# Altium PCB ESP-RC-Car_OLDPCB.PcbDoc (part 1 of 2)
Units mm, origin at the board's own origin, x right, y up, seen from the top; angles counter-clockwise.
Board outline 100.25 x 60.25 mm, 4 copper layers (Top Layer, Int1 (Signal), Int2 (GND), Bottom Layer(PWR)), stack 1.586 mm thick; 110 components, 97 nets, 403 pads, 371 vias.
Unrouted connection lines stored in the file: 1.
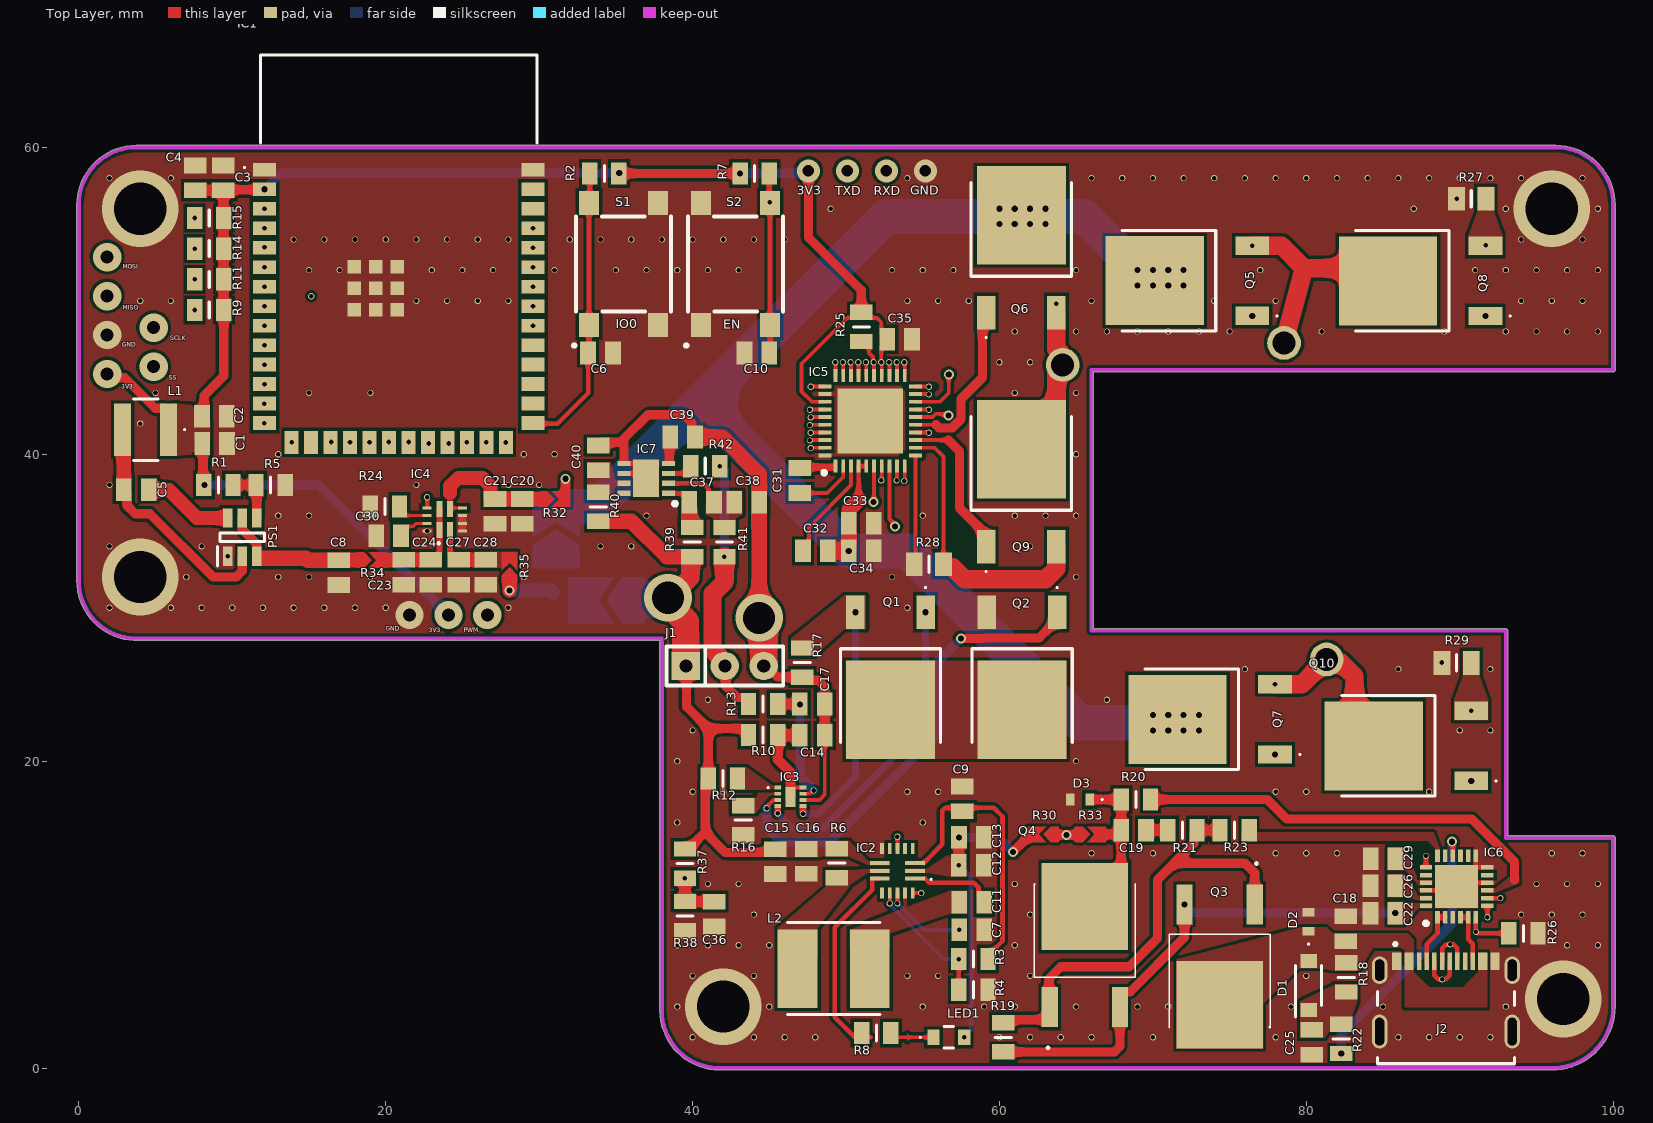
[diagram p0: Top Layer view]
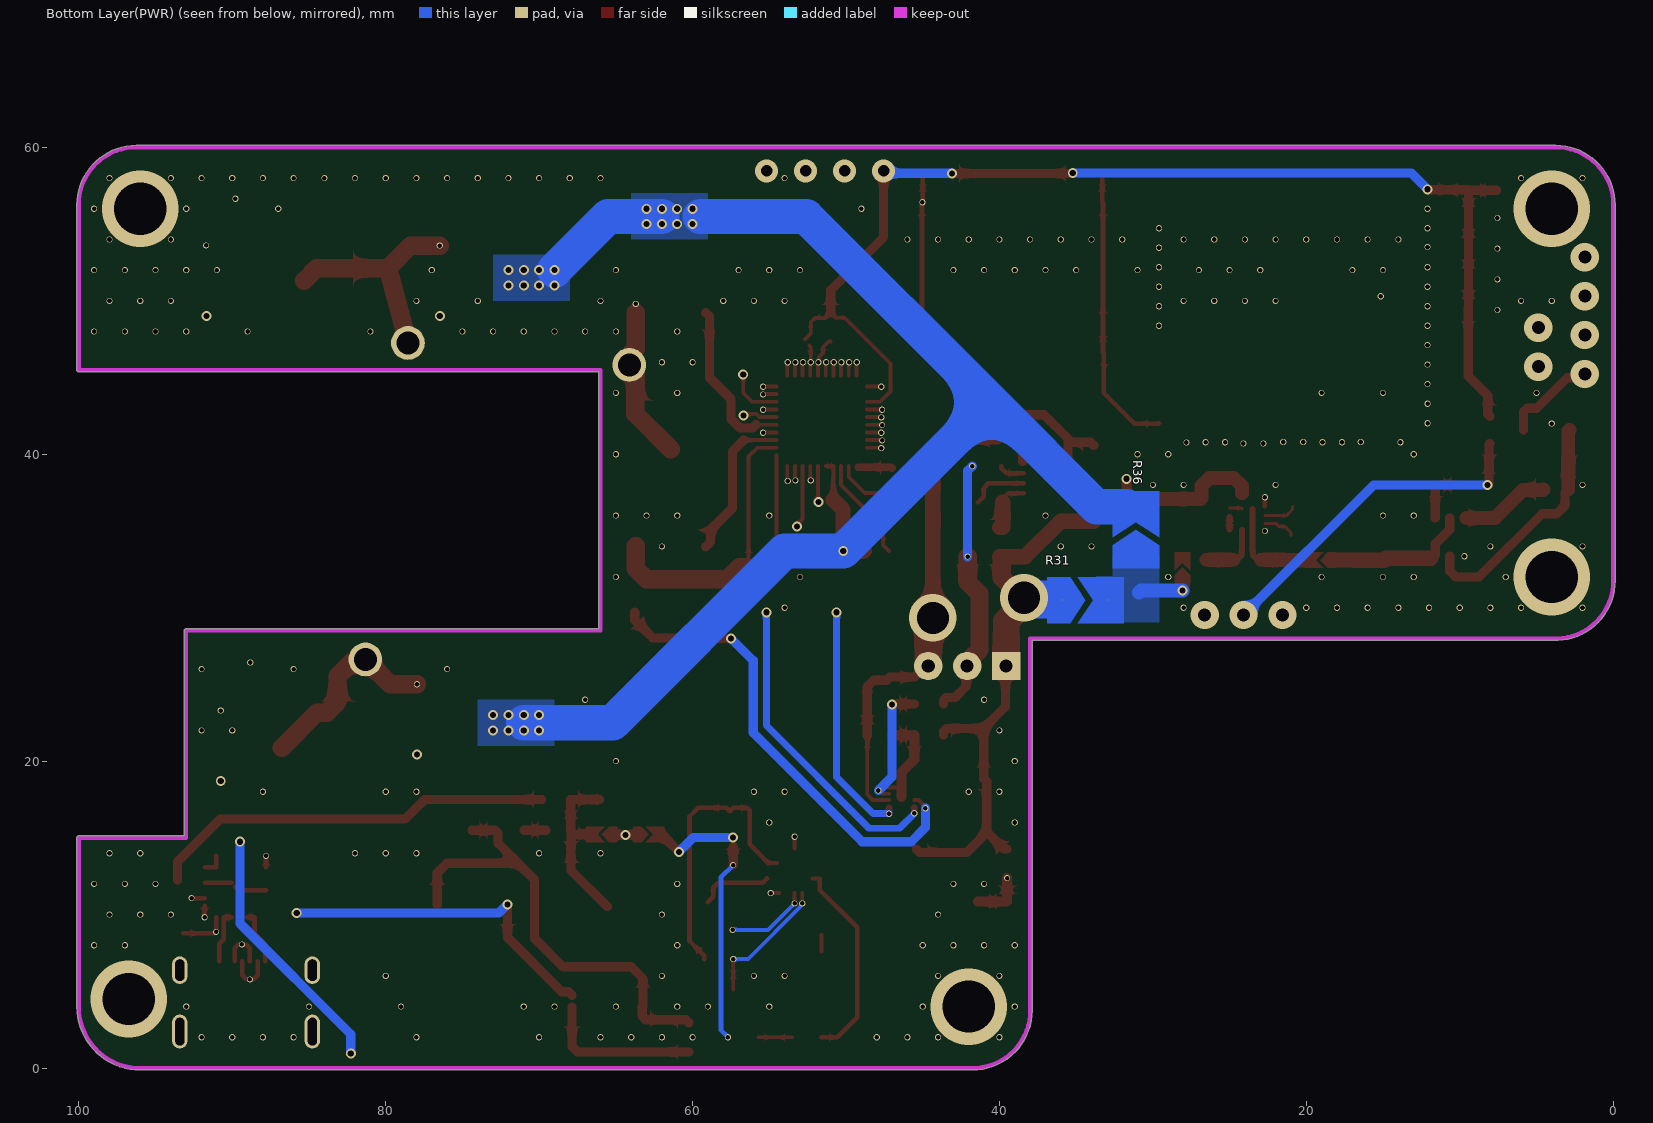
[diagram p1: Bottom Layer(PWR) view, seen from below]
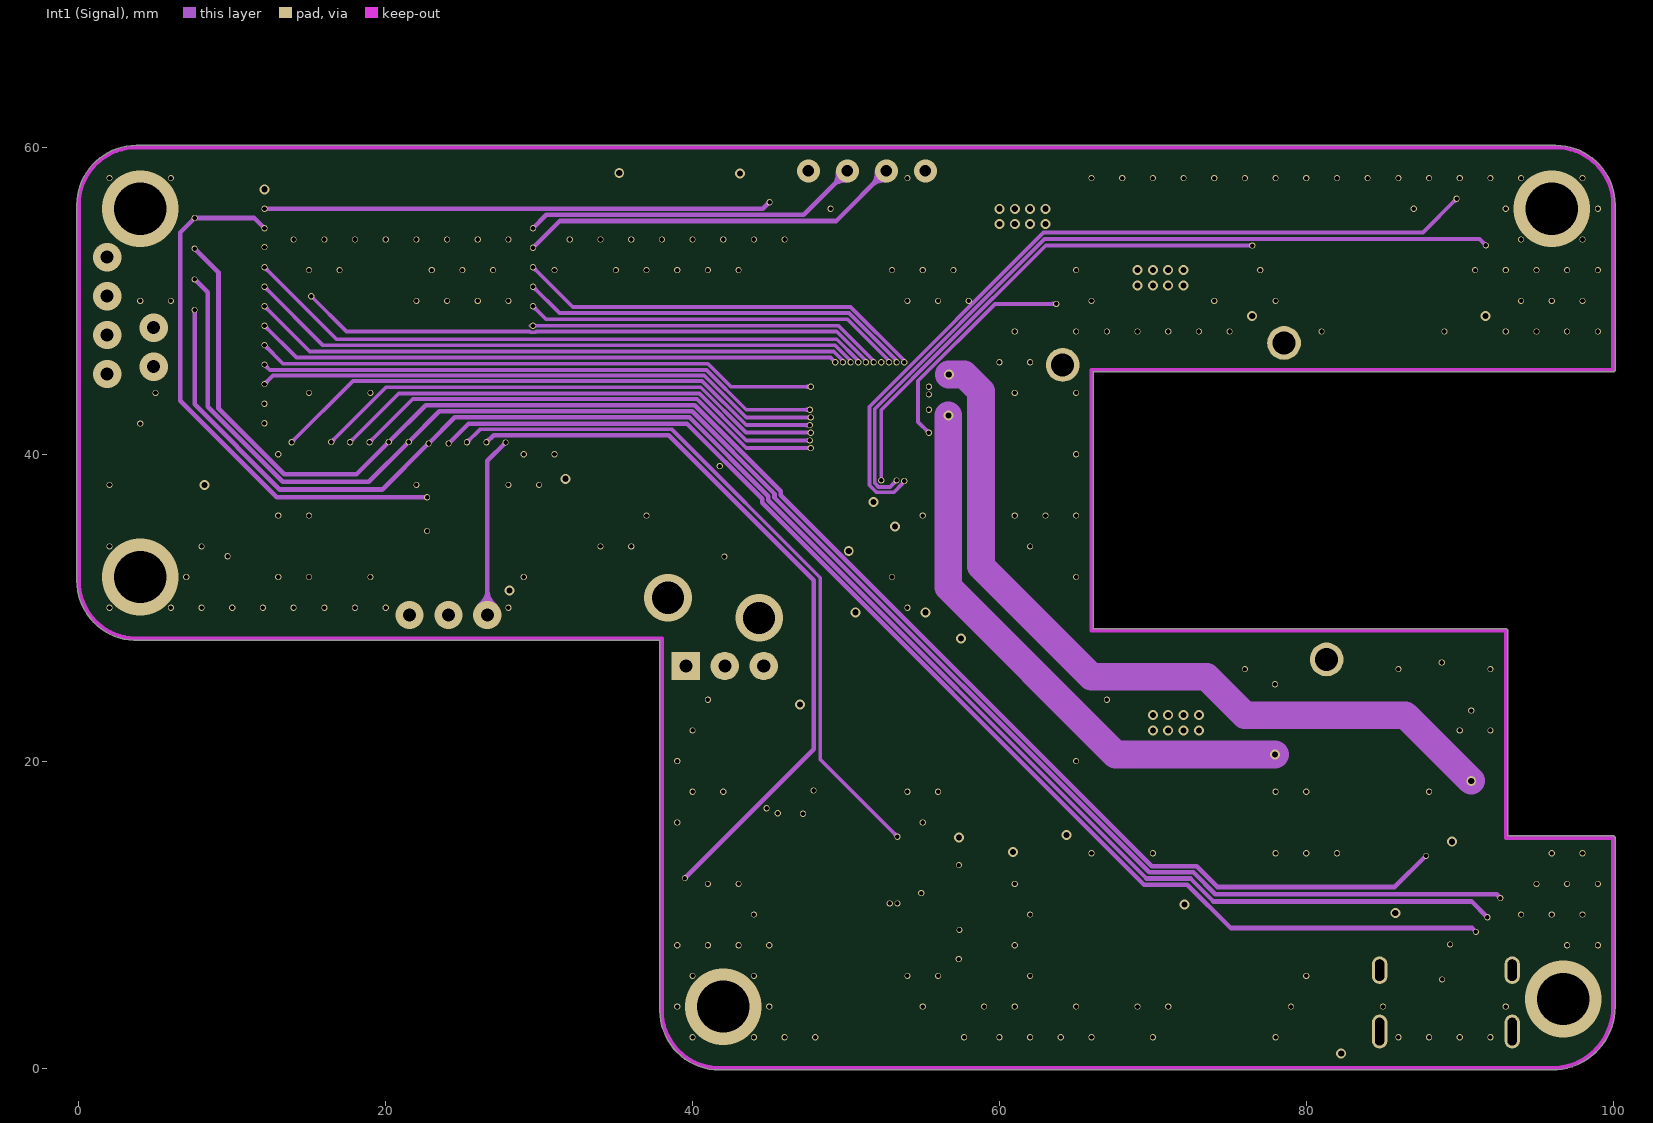
[diagram p2: Int1 (Signal)]
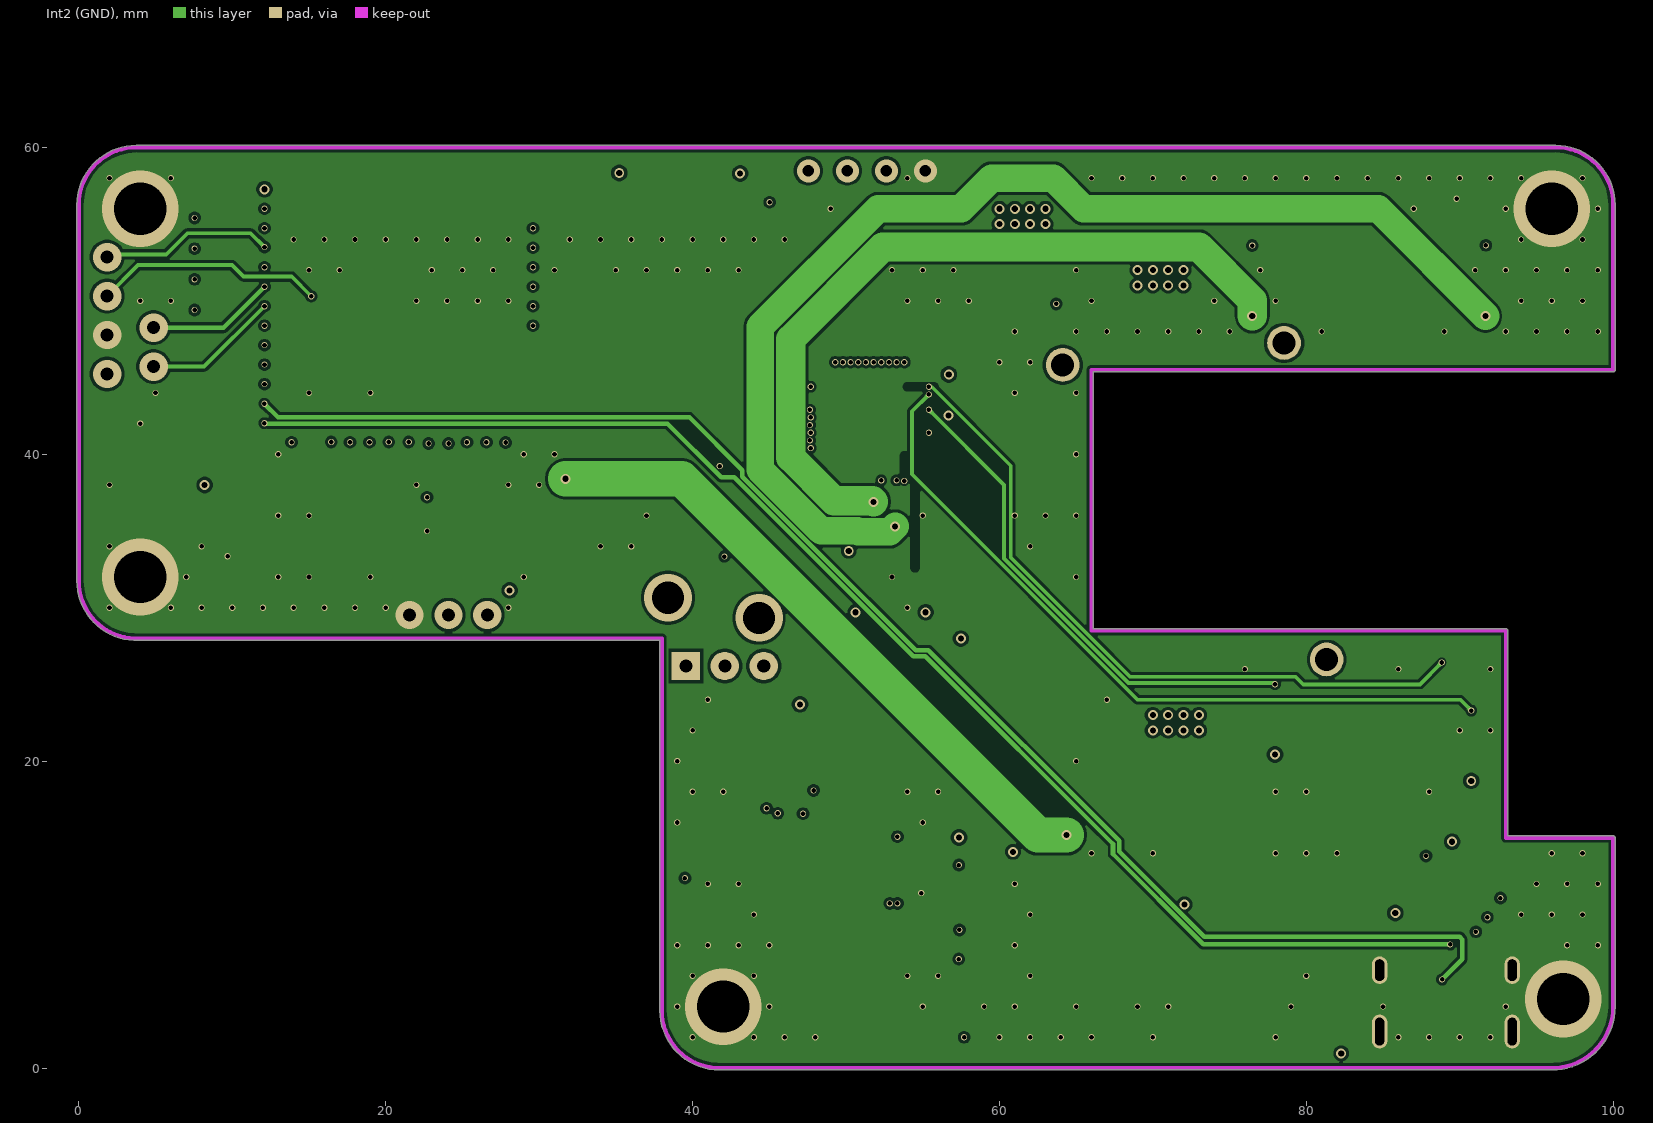
[diagram p3: Int2 (GND)]

## Layer stack, top to bottom
Top Solder: solder mask 0.0254, SM-001, Dk 4
Top Layer: signal copper 0.035
Dielectric 1: prepreg 0.2104, PP-017, Dk 4.3
Int1 (Signal): signal copper 0.0152
Dielectric 3: core 1.065, Core-039, Dk 4.8
Int2 (GND): signal copper 0.0152
Dielectric 5: prepreg 0.2104, PP-017, Dk 4.3
Bottom Layer(PWR): signal copper 0.035
Bottom Solder: solder mask 0.0254, SM-001, Dk 4

## Board outline
3.596,27.876 37.873,27.873 37.873,3.75 ccw(c41.75,3.75) 41.749,-0.127 41.75,-0.127 96,-0.127 ccw(c96,4) 100.127,4 100.127,5 100.127,15 ccw(c100,15) 100,15.127 93.127,15.127 93.127,28.5 ccw(c93,28.5) 93,28.627 66.127,28.627 66.127,45.373 100,45.373 ccw(c100,45.5) 100.127,45.5 100.127,56.25 ccw(c96.25,56.25) 96.25,60.127 3.75,60.127 ccw(c3.75,56.25) -0.127,56.25 -0.127,31.75 ccw(c3.75,31.75)

## Design rules (kind name [scope] priority, off if disabled: settings)
Clearance [All] p1: gap=0.2 ignorepadtopadclearanceinfootprint=TRUE except(0.1: Arc-Arc Arc-Track Arc-SMDPad Arc-THPad Arc-Via Arc-Text Arc-Hole Track-Track Track-SMDPad Track-THPad Track-Via Track-Text Track-Hole SMDPad-SMDPad SMDPad-THPad SMDPad-Via SMDPad-Text SMDPad-Hole THPad-THPad THPad-Via THPad-Text THPad-Hole Via-Via Via-Text Via-Hole Text-Text Text-Hole)
HoleSize [All] p1: absolutevalues=TRUE maxlimit=10 minlimit=0.025 maxpercent=80.000 minpercent=20.000
HoleToHoleClearance [All] p1: gap=0 allowstackedmicrovias=TRUE
PlaneConnect [All] p1: planeconnectstyle=Direct reliefexpansion=0.508 reliefentries=4 reliefconductorwidth=0.254 reliefairgap=0.254
PolygonConnect [All] p1: connectstyle=Direct reliefconductorwidth=0.254 reliefentries=4 polygonreliefangle="90 Angle" airgapwidth=0.254
RoutingVias [All] p1: holewidth=10 width=10 viastyle="Through Hole" minholewidth=0.3 minwidth=0.4 maxholewidth=10 maxwidth=10
SolderMaskExpansion [All] p1: expansion=0.102 istentingtop=FALSE
SupplyNets "Schematic Supply Nets_10" [InNet('VBATM')] p1: voltage=0.000
SupplyNets "Schematic Supply Nets_9" [InNet('VBAT-')] p2: voltage=0.000
SupplyNets "Schematic Supply Nets_8" [InNet('VBAT+')] p3: voltage=0.000
SupplyNets "Schematic Supply Nets_2" [InNet('VDRAIN')] p4: voltage=0.000
SupplyNets "Schematic Supply Nets_3" [InNet('VBATJ')] p5: voltage=0.000
SupplyNets "Schematic Supply Nets_7" [InNet('GND')] p6: voltage=0.000
SupplyNets "Schematic Supply Nets_6" [InNet('VMCU')] p7: voltage=0.000
SupplyNets "Schematic Supply Nets_5" [InNet('VBUS')] p8: voltage=0.000
SupplyNets "Schematic Supply Nets_4" [InNet('VSYS')] p9: voltage=0.000
SupplyNets "Schematic Supply Nets" [InNet('3V3')] p10: voltage=0.000
Width [All] p1: maxlimit=10 minlimit=0.1 preferedwidth=0.254
27 further rules are at their usual default settings.

## Components (designator, comment, footprint, x,y, rotation, side; value= is the part's Value field where it differs from the comment)
C1 "0805 22uF" CAPC2012X94N 8.85,40.7 r0 top
C2 "0805 22uF" CAPC2012X94N 8.835,42.475 r0 top
C3 "0805 10uF" CAPC2012X94N 9.4,58.01 r270 top
C4 "0805 100nF" CAPC2012X94N 7.6,58.01 r270 top
C5 "0805 0.1uF" CAPC2012X94N 3.74,37.7 r180 top
C6 "0805 10nF" CAPC2012X94N 34,46.6 r180 top
C7 "0805 1uF" CAPC2012X94N 58.2,9 r180 top
C8 "0805 2.2uF" CAPC2012X94N 16.95,32.285 r90 top
C9 "0805 1uF" CAPC2012X94N 57.575,17.535 r270 top
C10 "0805 10nF" CAPC2012X94N 44.19,46.6 r180 top
C11 "0805 10uF" CAPC2012X94N 58.19,10.8 r180 top
C12 "0805 10uF" CAPC2012X94N 58.165,13.225 r180 top
C13 "0805 10uF" CAPC2012X94N 58.175,15.025 r180 top
C14 "0805 0.1uF" CAPC2012X94N 47.8,21.675 r180 top
C15 "0805 10uF" CAPC2012X94N 45.4,13.45 r90 top
C16 "0805 10uF" CAPC2012X94N 47.4,13.46 r90 top
C17 "0805 0.1F" CAPC2012X94N 47.8,23.725 r180 top
C18 "0805 100nF" CAPC2012X94N 82.575,9.075 r90 top
C19 "0805 100nF" CAPC2012X94N 68.74,15.5 r0 top
C20 "0805 1uF" CAPC2012X94N 28.9,36.275 r270 top
C21 "0805 10uF" CAPC2012X94N 27.125,36.275 r270 top
C22 "0805 1uF" CAPC2012X94N 84.99,10.1 r0 top
C23 "0805 1uF" CAPC2012X94N 21.175,32.31 r270 top
C24 "0805 10uF" CAPC2012X94N 22.95,32.31 r270 top
C25 "0805 100nF" CAPC2012X94N 80.35,1.675 r270 top
C26 "0805 1uF" CAPC2012X94N 84.99,11.875 r180 top
C27 "0805 1uF" CAPC2012X94N 24.75,32.31 r270 top
C28 "0805 10uF" CAPC2012X94N 26.525,32.31 r270 top
C29 "0805 1uF" CAPC2012X94N 85,13.65 r0 top
C30 "0805 1uF" CAPC2012X94N 20.19,34.7 r0 top
C31 "0805 47nF" CAPC2012X94N 47,38.29 r90 top
C32 "0805 1uF" CAPC2012X94N 48.01,33.7 r180 top
C33 "0805 0.1uF" CAPC2012X94N 51,35.5 r180 top
C34 "0805 10uF" CAPC2012X94N 50.99,33.7 r180 top
C35 "0805 0.1uF" CAPC2012X94N 53.49,47.5 r180 top
C36 "0805 10nF" CAPC2012X94N 41.4,10.035 r90 top
C37 "0805 0.1uF" CAPC2012X94N 40.585,36.875 r180 top
C38 "0805 0.1 uF" CAPC2012X94N 43.535,36.875 r180 top
C39 "0805 0.33uF" CAPC2012X94N 39.35,41.125 r180 top
C40 "0805 0.1uF" CAPC2012X94N 33.85,39.76 r270 top
D1 "Schottky" SODFL3517X110N 80.15,5.375 r90 top
D2 "ESDA25P35-1U1M" ESDA25P351U1M 80.15,9.525 r270 top
D3 "ESDA25P35-1U1M" ESDA25P351U1M 65.25,17.5 r0 top
IC1 "ESP32-S3-WROOM-1-N8" ESP32S3WROOM1N8R2 20.85,53.28 r0 top
IC2 "MP2615AGQ-Z" MP2615AGQZ 53.35,12.85 r180 top
IC3 "S-82B2AAA-A8T2U" S82B2AAAA8T2U 46.375,17.675 r270 top
IC4 "TPS2121RUXT" TPS2121RUXT 23.85,35.75 r90 top
IC5 "DRV8323SRTAR" QFN50P600X600X80-41N-D 51.575,42.175 r90 top
IC6 "STUSB4500QTR" QFN50P400X400X100-25N-D 89.8,11.825 r90 top
IC7 "BQ29200DRBT" SON65P300X300X100-9N-D 36.975,38.425 r180 top
J1 "2s Battery" Sip-3 42.1,26.2 r0 top
J2 "USB4215-03-A_REVA" GCT_USB4215-03-A_REVA 89.1,2.375 r0 top
L1 "ASPI-4030S-5R6M-T" ASPI-4030S 4.35,41.6 r180 top
L2 "74404064068" INDPM6060X450N 49.2,6.475 r0 top
LED1 "150224BS73100" 150224BS73100 56.7,2 r0 top
PS1 "LMR51430XDDCR" SOT95P280X110-6N 10.65,34.6 r90 top
Q1 "IPD047N03LF2SATMA1" IPD047N03LF2SATMA1 52.9,25.465 r180 top
Q2 "IPD047N03LF2SATMA1" IPD047N03LF2SATMA1 61.475,25.465 r180 top
Q3 "DMP3007LK3-13" DMP3007LK313 74.35,5.675 r180 top
Q4 "DMP3007LK3-13" DMP3007LK313 65.564,8.96 r0 top
Q5 "IPD047N03LF2SATMA1" IPD047N03LF2SATMA1 72.24,51.31 r90 top
Q6 "IPD047N03LF2SATMA1" IPD047N03LF2SATMA1 61.425,53.46 r0 top
Q7 "IPD047N03LF2SATMA1" IPD047N03LF2SATMA1 73.725,22.725 r90 top
Q8 "IPD047N03LF2SATMA1" IPD047N03LF2SATMA1 87.44,51.3 r90 top
Q9 "IPD047N03LF2SATMA1" IPD047N03LF2SATMA1 61.425,38.21 r0 top
Q10 "IPD047N03LF2SATMA1" IPD047N03LF2SATMA1 86.515,21 r90 top
R1 "0805 22.1k" RESC2012X65N 9.1,38 r180 top
R2 "0805 22k" RESC2012X65N 34.25,58.3 r180 top
R3 "0805 10k" RESC2012X65N 58.3,7.1 r0 top
R4 "0805 10k" RESC2012X65N 58.3,5.1 r180 top
R5 "0805 100k" RESC2012X65N 12.5,38 r180 top
R6 "0805 50m" RESC2012X65N 49.4,13.35 r90 top
R7 "0805 22k" RESC2012X65N 44.05,58.3 r0 top
R8 "0805 1k" RESC2012X65N 51.975,2.275 r0 top
R9 "0805 22k" RESC2012X65N 8.5,49.4 r180 top
R10 "0805 100" RESC2012X65N 44.6,21.7 r180 top
R11 "0805 22k" RESC2012X65N 8.5,51.4 r180 top
R12 "0805 1k" RESC2012X65N 41.975,18.875 r180 top
R13 "0805 100" RESC2012X65N 44.6,23.725 r180 top
R14 "0805 22k" RESC2012X65N 8.5,53.4 r180 top
R15 "0805 22k" RESC2012X65N 8.5,55.4 r0 top
R16 "0805 1k" RESC2012X65N 43.3,16.15 r90 top
R17 "0805 4m" RESC2012X65N 47.15,26.425 r270 top
R18 "0805 470" RESC2012X65N 82.6,5.9 r90 top
R19 "0805 100k" RESC2012X65N 60.25,2 r270 top
R20 "0805 1k" RESC2012X65N 68.9,17.5 r180 top
R21 "0805 100" RESC2012X65N 71.925,15.5 r0 top
R22 "0805 1k" RESC2012X65N 82.275,1.9 r90 top
R23 "0805 22k" RESC2012X65N 75.325,15.5 r180 top
R24 "0805 22k" RESC2012X65N 19.95,36.6 r0 top
R25 "0805 24k" RESC2012X65N 51,48.3 r90 top
R26 "0805 100k" RESC2012X65N 94.15,8.775 r180 top
R27 "WSLP08057L000FEA18" RESC2013X58N 90.75,56.65 r0 top
R28 "WSLP08057L000FEA18" RESC2013X58N 55.4,32.825 r0 top
R29 "WSLP08057L000FEA18" RESC2013X58N 89.8,26.4 r0 top
R30 "Jumper" "Solder Jumper 5A" 63.85,15.725 r180 top
R31 "Jumper" "Solder Jumper 9A" 36.9,29 r180 bottom
R32 "Jumper" "Solder Jumper 5A" 30.025,36.575 r0 top
R33 "Jumper" "Solder Jumper 5A" 64.925,14.725 r0 top
R34 "Jumper" "Solder Jumper 5A" 18.1,32.6 r0 top
R35 "Jumper" "Solder Jumper 5A" 28.575,31.625 r90 top
R36 "Jumper" "Solder Jumper 9A" 29.6,32.575 r90 bottom
R37 "0805 1.8M" RESC2012X65N 39.5,13.325 r90 top
R38 "0805 1M" RESC2012X65N 39.5,9.9 r90 top
R39 "0805 160" RESC2012X65N 39.975,34.275 r270 top
R40 "0805 100" RESC2012X65N 33.85,36.575 r90 top
R41 "0805 260" RESC2012X65N 42.075,34.275 r270 top
R42 "0805 100" RESC2012X65N 40.825,39.225 r0 top
S1 "5x5mm Button" 430182070816 35.5,52.4 r90 top
S2 "5x5mm Button" 430182070816 42.8,52.4 r90 top

## Footprints (in the part's own frame and the unit in brackets; to place one, negate y for a bottom-side part, rotate by r counter-clockwise, add the part's x,y. Pads: shape width x height; smd on the part's side, far side on the other; paste and mask are expansions set on the pad)
150224BS73100 [mm]
  rect 0.8x1 smd: 1(-1,0) 2(1,0)
  silkscreen extent -1.9,-0.7 0.3,0.7, body extent -1.15,-0.7 1.15,0.7, height 1.31
430182070816 [mm]
  rect 1.55x1.3 smd: 1(-3.975,2.25) 2(-3.975,-2.25) 3(3.975,2.25) 4(3.975,-2.25)
  silkscreen extent -5.39,-3.1 3.1,3.29, body extent -4.5,-3.1 4.5,3.1, height 5
ASPI-4030S [mm]
  rect 1.1x3.4 smd: 1(-1.5,0) 2(1.5,0)
  silkscreen extent -2.6,-2 0.8,2, body extent -2,-2 2,2, height 3
CAPC2012X94N [mm]
  rect 1.02x1.47 smd: 1(-0.81,0) 2(0.81,0)
  body extent -1,-0.63 1,0.63, height 0.94
DMP3007LK313 [mm]
  rect 1.06x2.6 smd: 1(-2.286,-4.985) 3(2.286,-4.985)
  rect 5.632x5.7 smd: 2(-0.001,1.565)
  silkscreen extent -3.29,-7.7 3.29,3.05, body extent -3.3,-5.94 3.3,4.16, height 2.58
ESDA25P351U1M [mm]
  rect 0.55x0.8 smd: 1(0.625,0) 2(-0.625,0)
  silkscreen extent 1.4,-0.05 1.5,0.05, body extent -0.8,-0.5 0.8,0.5, height 0.57
ESP32S3WROOM1N8R2 [mm]
  rect 1.5x0.9 smd: 1(-8.75,5.26) 2(-8.75,3.99) 3(-8.75,2.72) 4(-8.75,1.45) 5(-8.75,0.18) 6(-8.75,-1.09) 7(-8.75,-2.36) 8(-8.75,-3.63) 9(-8.75,-4.9) 10(-8.75,-6.17) 11(-8.75,-7.44) 12(-8.75,-8.71) 13(-8.75,-9.98) 14(-8.75,-11.25) 27(8.75,-11.25) 28(8.75,-9.98) 29(8.75,-8.71) 30(8.75,-7.44) 31(8.75,-6.17) 32(8.75,-4.9) 33(8.75,-3.63) 34(8.75,-2.36) 35(8.75,-1.09) 36(8.75,0.18) 37(8.75,1.45) 38(8.75,2.72) 39(8.75,3.99) 40(8.75,5.26)
  rect 0.9x1.5 smd: 15(-6.985,-12.5) 16(-5.715,-12.5) 17(-4.445,-12.5) 18(-3.175,-12.5) 19(-1.905,-12.5) 20(-0.635,-12.5) 21(0.635,-12.5) 22(1.905,-12.5) 23(3.175,-12.5) 24(4.445,-12.5) 25(5.715,-12.5) 26(6.985,-12.5)
  rect 0.9x0.9 smd: 41(-1.5,-2.46) 42(-1.5,-1.06) 43(-2.9,-1.06) 44(-2.9,-2.46) 45(-2.9,-3.86) 46(-1.5,-3.86) 47(-0.1,-3.86) 48(-0.1,-2.46) 49(-0.1,-1.06)
  silkscreen extent -10.1,5.35 9,12.75, body extent -9,-12.75 9,12.75, height 2.7
GCT_USB4215-03-A_REVA [mm]
  rect 0.6x1.15 smd: A1_B12(-3.2,4.575) A4_B9(-2.4,4.575) B1_A12(3.2,4.575) B4_A9(2.4,4.575)
  rect 0.3x1.15 smd: A5(-1.25,4.575) A6(-0.25,4.575) A7(0.25,4.575) A8(1.25,4.575) B5(1.75,4.575) B6(0.75,4.575) B7(-0.75,4.575) B8(-1.75,4.575)
  oval 1x1.8 hole 0.6 slot 1.4 at 90 deg: SH1(-4.32,4) SH2(4.32,4)
  oval 1x2.2 hole 0.6 slot 1.8 at 90 deg: SH3(-4.32,0) SH4(4.32,0)
  silkscreen extent -4.47,-2.1 4.47,5.8, body extent -4.44,-2 4.5,4.75, height 3.28
INDPM6060X450N [mm]
  rect 2.6x5.1 smd: 1(-2.35,0) 2(2.35,0)
  silkscreen extent -3,-3 3,3, body extent -3,-3 3,3, height 4.5
IPD047N03LF2SATMA1 [mm]
  rect 1.2x2.2 smd: 1(-2.29,-4.235) 3(2.29,-4.235)
  rect 5.8x6.4 smd: 2(0,2.115)
  silkscreen extent -3.27,-5.9 3.27,4.24, body extent -3.3,-5.05 3.3,5.05, height 2.58
MP2615AGQZ [mm]
  rect 1.3x0.25 smd: 1(-1.15,0.5) 2(-1.15,0) 3(-1.15,-0.5) 9(1.15,-0.5) 10(1.15,0) 11(1.15,0.5)
  rect 0.25x0.7 smd: 4(-1,-1.45) 5(-0.5,-1.45) 6(0,-1.45) 7(0.5,-1.45) 8(1,-1.45) 12(1,1.45) 13(0.5,1.45) 14(0,1.45) 15(-0.5,1.45) 16(-1,1.45)
  silkscreen extent -2.25,0.5 -2.15,0.6, body extent -1.5,-1.5 1.5,1.5, height 1.1
QFN50P400X400X100-25N-D [mm]
  rect 0.8x0.3 smd: 1(-2,1.25) 2(-2,0.75) 3(-2,0.25) 4(-2,-0.25) 5(-2,-0.75) 6(-2,-1.25) 13(2,-1.25) 14(2,-0.75) 15(2,-0.25) 16(2,0.25) 17(2,0.75) 18(2,1.25)
  rect 0.3x0.8 smd: 7(-1.25,-2) 8(-0.75,-2) 9(-0.25,-2) 10(0.25,-2) 11(0.75,-2) 12(1.25,-2) 19(1.25,2) 20(0.75,2) 21(0.25,2) 22(-0.25,2) 23(-0.75,2) 24(-1.25,2)
  rect 2.8x2.8 smd: 25(0,0)
  silkscreen extent -2.52,1.88 -2.28,2.12, body extent -2.05,-2.05 2.05,2.05, height 1
QFN50P600X600X80-41N-D [mm]
  rect 0.85x0.25 smd: 1(-2.95,2.25) 2(-2.95,1.75) 3(-2.95,1.25) 4(-2.95,0.75) 5(-2.95,0.25) 6(-2.95,-0.25) 7(-2.95,-0.75) 8(-2.95,-1.25) 9(-2.95,-1.75) 10(-2.95,-2.25) 21(2.95,-2.25) 22(2.95,-1.75) 23(2.95,-1.25) 24(2.95,-0.75) 25(2.95,-0.25) 26(2.95,0.25) 27(2.95,0.75) 28(2.95,1.25) 29(2.95,1.75) 30(2.95,2.25)
  rect 0.25x0.85 smd: 11(-2.25,-2.95) 12(-1.75,-2.95) 13(-1.25,-2.95) 14(-0.75,-2.95) 15(-0.25,-2.95) 16(0.25,-2.95) 17(0.75,-2.95) 18(1.25,-2.95) 19(1.75,-2.95) 20(2.25,-2.95) 31(2.25,2.95) 32(1.75,2.95) 33(1.25,2.95) 34(0.75,2.95) 35(0.25,2.95) 36(-0.25,2.95) 37(-0.75,2.95) 38(-1.25,2.95) 39(-1.75,2.95) 40(-2.25,2.95)
  rect 4.25x4.25 smd: 41(0,0)
  silkscreen extent -3.5,2.87 -3.25,3.12, body extent -3,-3 3,3, height 1
RESC2012X65N [mm]
  rect 1x1.45 smd: 1(-0.95,0) 2(0.95,0)
  silkscreen extent 0,-0.53 0,0.53, body extent -0.77,-0.4 0.77,0.4, height 0.46
RESC2013X58N [mm]
  rect 1.1x1.55 smd: 1(-0.95,0) 2(0.95,0)
  silkscreen extent 0,-0.54 0,0.54, body extent -1.01,-0.64 1.01,0.64, height 0.36
S82B2AAAA8T2U [mm]
  rect 0.25x0.45 smd: 1(-0.6,-0.825) 2(-0.2,-0.825) 3(0.2,-0.825) 4(0.6,-0.825) 5(0.6,0.825) 6(0.2,0.825) 7(-0.2,0.825) 8(-0.6,0.825)
  rect 1.3x0.65 smd: 9(0,0)
  silkscreen extent -0.65,-1.5 -0.55,-1.4, body extent -0.8,-0.75 0.8,0.75, height 0.5
Sip-3 [mm]
  rect 1.85x1.85 hole 0.85: 1(-2.54,0)
  round 1.85 hole 0.85: 2(0,0) 3(2.54,0)
  silkscreen extent -3.81,-1.27 3.81,1.27
SODFL3517X110N [mm]
  rect 0.92x1.08 smd: 1(-1.6,0) 2(1.6,0)
  silkscreen extent -2.06,-0.85 1.3,0.85, body extent -1.75,-1.09 1.75,0.91, height 1.07
"Solder Jumper 5A" [mm]
  round 0.025 smd: 1(0.5,0.5) 2(1.5,0.5)
  Top Layer region: 0.8,0 1.3,0.5 0.8,1 2,1 2,0
  Top Layer region: 0,0 0,1 0.5,1 1,0.5 0.5,0
"Solder Jumper 9A" [mm]
  round 0.025 smd: 1(1,1.5) 2(4,1.5)
  Top Layer region: 0,0 0,3 1.5,3 2.5,1.5 1.5,0
  Top Layer region: 2,0 3,1.5 2,3 5,3 5,0
SON65P300X300X100-9N-D [mm]
  rect 0.85x0.35 smd: 1(-1.45,0.975) 2(-1.45,0.325) 3(-1.45,-0.325) 4(-1.45,-0.975) 5(1.45,-0.975) 6(1.45,-0.325) 7(1.45,0.325) 8(1.45,0.975)
  rect 1.7x2.45 smd: 9(0,0)
  silkscreen extent -2,1.53 -1.75,1.77, body extent -1.5,-1.5 1.5,1.5, height 0.77
SOT95P280X110-6N [mm]
  rect 1.25x0.6 smd: 1(-1.25,0.95) 2(-1.25,0) 3(-1.25,-0.95) 4(1.25,-0.95) 5(1.25,0) 6(1.25,0.95)
  silkscreen extent -1.88,-1.45 0.28,1.6, body extent -1.4,-1.45 1.4,1.45, height 0.97
TPS2121RUXT [mm]
  rect 1.05x0.4 smd: 1(-0.675,0.35) 2(-0.675,-0.35) 7(0.675,-0.35) 8(0.675,0.35)
  rect 0.2x0.6 smd: 3(-0.75,-1.15) 4(-0.25,-1.15) 5(0.25,-1.15) 6(0.75,-1.15) 9(0.75,1.15) 10(0.25,1.15) 11(-0.25,1.15) 12(-0.75,1.15)
  silkscreen extent -1.6,0.35 -1.5,0.45, body extent -1.05,-1.3 1.05,1.3, height 1

## Part data
C1 C2: library part 08055A150JAT2A, "Capacitor 25V", Manufacturer_Name="Kyocera AVX", Mouser Part Number=581-08055A150J, Arrow Part Number=08055A150JAT2A, Arrow Price/Stock=https://www.arrow.com/en/products/08055a150jat2a/avx?region=nac, Datasheet Link=https://componentsearchengine.com/Datasheets/1/06031A100FAT2A.pdf, Height=0.94mm, Manufacturer_Part_Number=08055A150JAT2A, Mouser Price/Stock=https://www.mouser.co.uk/ProductDetail/AVX/08055A150JAT2A?qs=pZVDklL%2Fs8hiEua37sqbaA%3D%3D
C3 C4 C5 C6 C7 C8 C9 C10 C11 C12 C13 C14 C15 C16 C17 C36 C37 C38 C39 C40: library part 08055A150JAT2A, "Capacitor", Manufacturer_Name="Kyocera AVX", Mouser Part Number=581-08055A150J, Arrow Part Number=08055A150JAT2A, Arrow Price/Stock=https://www.arrow.com/en/products/08055a150jat2a/avx?region=nac, Datasheet Link=https://componentsearchengine.com/Datasheets/1/06031A100FAT2A.pdf, Height=0.94mm, Manufacturer_Part_Number=08055A150JAT2A, Mouser Price/Stock=https://www.mouser.co.uk/ProductDetail/AVX/08055A150JAT2A?qs=pZVDklL%2Fs8hiEua37sqbaA%3D%3D
C18 C19 C20 C21 C22 C23 C24 C25 C26 C27 C28 C29 C30 C31 C34 C35: library part 08055A150JAT2A, "0805", Manufacturer_Name="Kyocera AVX", Mouser Part Number=581-08055A150J, Arrow Part Number=08055A150JAT2A, Arrow Price/Stock=https://www.arrow.com/en/products/08055a150jat2a/avx?region=nac, Datasheet Link=https://componentsearchengine.com/Datasheets/1/06031A100FAT2A.pdf, Height=0.94mm, Manufacturer_Part_Number=08055A150JAT2A, Mouser Price/Stock=https://www.mouser.co.uk/ProductDetail/AVX/08055A150JAT2A?qs=pZVDklL%2Fs8hiEua37sqbaA%3D%3D
C32: library part 08055A150JAT2A, "0805 16V X5R/X7R", Manufacturer_Name="Kyocera AVX", Mouser Part Number=581-08055A150J, Arrow Part Number=08055A150JAT2A, Arrow Price/Stock=https://www.arrow.com/en/products/08055a150jat2a/avx?region=nac, Datasheet Link=https://componentsearchengine.com/Datasheets/1/06031A100FAT2A.pdf, Height=0.94mm, Manufacturer_Part_Number=08055A150JAT2A, Mouser Price/Stock=https://www.mouser.co.uk/ProductDetail/AVX/08055A150JAT2A?qs=pZVDklL%2Fs8hiEua37sqbaA%3D%3D
C33: library part 08055A150JAT2A, "0805 VM rated", Manufacturer_Name="Kyocera AVX", Mouser Part Number=581-08055A150J, Arrow Part Number=08055A150JAT2A, Arrow Price/Stock=https://www.arrow.com/en/products/08055a150jat2a/avx?region=nac, Datasheet Link=https://componentsearchengine.com/Datasheets/1/06031A100FAT2A.pdf, Height=0.94mm, Manufacturer_Part_Number=08055A150JAT2A, Mouser Price/Stock=https://www.mouser.co.uk/ProductDetail/AVX/08055A150JAT2A?qs=pZVDklL%2Fs8hiEua37sqbaA%3D%3D
D1: library part PMEG3010ER, "Schottky Diode", Manufacturer_Name=Nexperia, Mouser Part Number=N/A, Datasheet Link=https://datasheet.datasheetarchive.com/originals/distributors/Datasheets-NXP/DSANXP010004875.pdf, Height=1.1mm, Manufacturer_Part_Number=PMEG3010ER, Mouser Price/Stock=https://www.mouser.co.uk/ProductDetail/Nexperia/PMEG3010ER?qs=vHuUswq2%252BswA%252BkrsHFmQzA%3D%3D
D2 D3: "TVS Diode (Uni-directional)", Manufacturer_Name=STMicroelectronics, Mouser Part Number=511-ESDA25P35-1U1M, Arrow Part Number=ESDA25P35-1U1M, Arrow Price/Stock=https://www.arrow.com/en/products/esda25p35-1u1m/stmicroelectronics?utm_currency=USD&region=europe, Datasheet Link=https://www.st.com/resource/en/datasheet/esda25p35-1u1m.pdf, Height=0.6mm, Manufacturer_Part_Number=ESDA25P35-1U1M, Mouser Price/Stock=https://www.mouser.co.uk/ProductDetail/STMicroelectronics/ESDA25P35-1U1M?qs=aVyJF2WnouQUWqgNP85ZrA%3D%3D
IC1: "Integrated Circuit", Manufacturer_Name="Espressif Systems", Mouser Part Number=356-ESP32-S3WROOM1N8, Datasheet Link=https://www.espressif.com/sites/default/files/documentation/esp32-s3-wroom-1_wroom-1u_datasheet_en.pdf, Height=3.25mm, Manufacturer_Part_Number=ESP32-S3-WROOM-1-N8, Mouser Price/Stock=https://www.mouser.co.uk/ProductDetail/Espressif-Systems/ESP32-S3-WROOM-1-N8?qs=Wj%2FVkw3K%252BMC1mq0KGPvoSQ%3D%3D
IC2: "Integrated Circuit", Manufacturer_Name="Monolithic Power Systems (MPS)", Mouser Part Number=946-MP2615AGQ-Z, Datasheet Link=https://www.monolithicpower.com/en/documentview/productdocument/index/version/2/document_type/Datasheet/lang/en/sku/MP2615AGQ-Z/document_id/1433/, Height=1mm, Manufacturer_Part_Number=MP2615AGQ-Z, Mouser Price/Stock=https://www.mouser.co.uk/ProductDetail/Monolithic-Power-Systems-MPS/MP2615AGQ-Z?qs=HiriQ40UqETtGEPnTGZTNQ%3D%3D
IC3: "Integrated Circuit", Manufacturer_Name="ABLIC Inc.", Mouser Part Number=628-S-82B2AAA-A8T2U, Datasheet Link=https://www.ablic.com/en/doc/datasheet/battery_protection/S82B2A_B_E.pdf, Height=0.4mm, Manufacturer_Part_Number=S-82B2AAA-A8T2U, Mouser Price/Stock=https://www.mouser.co.uk/ProductDetail/ABLIC/S-82B2AAA-A8T2U?qs=t7xnP681wgVKFpRRRjY2ng%3D%3D
IC4: "Integrated Circuit", Manufacturer_Name="Texas Instruments", Mouser Part Number=595-TPS2121RUXT, Arrow Part Number=TPS2121RUXT, Arrow Price/Stock=https://www.arrow.com/en/products/tps2121ruxt/texas-instruments?utm_currency=USD&region=nac, Datasheet Link=https://www.arrow.com/en/products/tps2121ruxt/texas-instruments, Height=1mm, Manufacturer_Part_Number=TPS2121RUXT, Mouser Price/Stock=https://www.mouser.co.uk/ProductDetail/Texas-Instruments/TPS2121RUXT?qs=l7cgNqFNU1i6abJCbO5ulQ%3D%3D
IC5: "Integrated Circuit", Manufacturer_Name="Texas Instruments", Mouser Part Number=595-DRV8323SRTAR, Arrow Part Number=DRV8323SRTAR, Arrow Price/Stock=https://www.arrow.com/en/products/drv8323srtar/texas-instruments?utm_currency=USD&region=nac, Datasheet Link=http://www.ti.com/lit/ds/symlink/drv8323.pdf, Height=0.8mm, Manufacturer_Part_Number=DRV8323SRTAR, Mouser Price/Stock=https://www.mouser.co.uk/ProductDetail/Texas-Instruments/DRV8323SRTAR?qs=u4fy%2FsgLU9P2gpPTX6mffg%3D%3D
IC6: "Integrated Circuit", Manufacturer_Name=STMicroelectronics, Mouser Part Number=511-STUSB4500QTR, Arrow Part Number=STUSB4500QTR, Arrow Price/Stock=https://www.arrow.com/en/products/stusb4500qtr/stmicroelectronics?utm_currency=USD&region=europe, Datasheet Link=https://www.st.com/resource/en/datasheet/stusb4500.pdf, Height=1mm, Manufacturer_Part_Number=STUSB4500QTR, Mouser Price/Stock=https://www.mouser.co.uk/ProductDetail/STMicroelectronics/STUSB4500QTR?qs=wUXugUrL1qyQbYMSzG1ujg%3D%3D
IC7: "Integrated Circuit", Manufacturer_Name="Texas Instruments", Mouser Part Number=595-BQ29200DRBT, Arrow Part Number=BQ29200DRBT, Arrow Price/Stock=https://www.arrow.com/en/products/bq29200drbt/texas-instruments?region=nac, Datasheet Link=http://www.ti.com/lit/ds/symlink/bq29200.pdf, Height=1mm, Manufacturer_Part_Number=BQ29200DRBT, Mouser Price/Stock=https://www.mouser.co.uk/ProductDetail/Texas-Instruments/BQ29200DRBT?qs=hEBn5lgDlCoXGMNHcYEAng%3D%3D
J1: library part CON3, "Stecker"
J2: "USB-C (USB TYPE-C) USB 2.0 Receptacle Connector 24 (16+8 Dummy) Position Surface Mount, Right Angle; Through Hole", Package=None, Check_prices=https://www.snapeda.com/parts/USB4215-03-A/Global+Connector+Technology/view-part/?ref=eda, MF="Global Connector Technology", MP=USB4215-03-A, SnapEDA_Link=https://www.snapeda.com/parts/USB4215-03-A/Global+Connector+Technology/view-part/?ref=snap
L1: "Inductor", Manufacturer_Name=ABRACON, Mouser Part Number=815-ASPI-4030S-5R6MT, Datasheet Link=https://abracon.com/Magnetics/power/ASPI-4030S.pdf, Height=3mm, Manufacturer_Part_Number=ASPI-4030S-5R6M-T, Mouser Price/Stock=https://www.mouser.co.uk/ProductDetail/ABRACON/ASPI-4030S-5R6M-T?qs=BLmuIjeT3qEs6vBfg%2FqMFg%3D%3D
L2: "Inductor", Manufacturer_Name="Wurth Elektronik", Mouser Part Number=710-74404064068, Datasheet Link=https://katalog.we-online.com/pbs/datasheet/74404064068.pdf, Height=4.5mm, Manufacturer_Part_Number=74404064068, Mouser Price/Stock=https://www.mouser.co.uk/ProductDetail/Wurth-Elektronik/74404064068?qs=Zt3UNFD9mQgMbZzq9pg0zg%3D%3D
LED1: "LED", Manufacturer_Name="Wurth Elektronik", Mouser Part Number=710-150224BS73100, Datasheet Link=https://www.we-online.com/components/products/datasheet/150224BS73100.pdf, Height=1.41mm, Manufacturer_Part_Number=150224BS73100, Mouser Price/Stock=https://www.mouser.co.uk/ProductDetail/Wurth-Elektronik/150224BS73100?qs=5aG0NVq1C4w%2FjMuF9nAPXA%3D%3D
PS1: "Power Supply 500kHz", Manufacturer_Name="Texas Instruments", Mouser Part Number=595-LMR51430XDDCR, Arrow Part Number=LMR51430XDDCR, Arrow Price/Stock=https://www.arrow.com/en/products/lmr51430xddcr/texas-instruments?utm_currency=USD&region=nac, Datasheet Link=https://www.ti.com/lit/ds/symlink/lmr51430.pdf?HQS=dis-mous-null-mousermode-dsf-pf-null-wwe&ts=1665567212982&ref_url=https%253A%252F%252Fwww.mouser.co.uk%252F, Height=1.1mm, Manufacturer_Part_Number=LMR51430XDDCR, Mouser Price/Stock=https://www.mouser.co.uk/ProductDetail/Texas-Instruments/LMR51430XDDCR?qs=vvQtp7zwQdP8miJIr5Aupg%3D%3D
Q1 Q2 Q5 Q6 Q7 Q8 Q9 Q10: "MOSFET (N-Channel)", Manufacturer_Name=Infineon, Mouser Part Number=726-IPD047N03LF2SATM, Datasheet Link=https://www.infineon.com/cms/en/product/power/mosfet/n-channel/ipd047n03lf2s/, Height=2.52mm, Manufacturer_Part_Number=IPD047N03LF2SATMA1, Mouser Price/Stock=https://www.mouser.co.uk/ProductDetail/Infineon-Technologies/IPD047N03LF2SATMA1?qs=3vio67wFuYq5Cj1%2F9iYlBQ%3D%3D
Q3 Q4: "MOSFET (P-Channel)", Manufacturer_Name="Diodes Incorporated", Mouser Part Number=621-DMP3007LK3-13, Datasheet Link=https://www.diodes.com/assets/Datasheets/DMP3007LK3.pdf, Height=2.39mm, Manufacturer_Part_Number=DMP3007LK3-13, Mouser Price/Stock=https://www.mouser.co.uk/ProductDetail/Diodes-Incorporated/DMP3007LK3-13?qs=17u8i%2FzlE8%252BiIxnE0yV1ZQ%3D%3D
R1 R3 R4 R5 R6 R8 R10 R12 R13 R16 R17 R39 R40 R41 R42: library part CPF0805B102RE1, "Resistor low tolerance", Manufacturer_Name="TE Connectivity", Datasheet Link=http://docs-europe.electrocomponents.com/webdocs/13d1/0900766b813d116f.pdf, Height=0.65mm, Manufacturer_Part_Number=CPF0805B102RE1
R2 R7 R9 R11 R14 R15 R18 R19 R20 R21 R22 R23 R24 R25 R26 R30 R31 R32 R33 R34 R35 R36 R37 R38: library part CPF0805B102RE1, "Resistor", Manufacturer_Name="TE Connectivity", Datasheet Link=http://docs-europe.electrocomponents.com/webdocs/13d1/0900766b813d116f.pdf, Height=0.65mm, Manufacturer_Part_Number=CPF0805B102RE1
R27 R28 R29: "Resistor", Manufacturer_Name=Vishay, Mouser Part Number=71-WSLP08057L000FEA1, Arrow Part Number=WSLP08057L000FEA18, Arrow Price/Stock=https://www.arrow.com/en/products/wslp08057l000fea18/vishay?region=nac, Datasheet Link=https://www.vishay.com/docs/30298/wslp18.pdf, Height=0.584mm, Manufacturer_Part_Number=WSLP08057L000FEA18, Mouser Price/Stock=https://www.mouser.co.uk/ProductDetail/Vishay-Dale/WSLP08057L000FEA18?qs=yAJ577jGV70jP0rOIAdIIA%3D%3D
S1 S2: library part 430182050816, "Switch", Manufacturer_Name="Wurth Elektronik", Mouser Part Number=710-430182050816, Datasheet Link=http://katalog.we-online.de/em/datasheet/4301x2xxx8x6.pdf, Manufacturer_Part_Number=430182050816, Mouser Price/Stock=https://www.mouser.co.uk/ProductDetail/Wurth-Elektronik/430182050816?qs=wr8lucFkNMUyle0jQPgWGw%3D%3D

## Free pads (board coordinates)
  round 2.2 hole 1.5: 6(64.125,45.825) 6(78.55,47.254) 6(81.325,26.625)

## Via types
v1: diameter 0.4, hole 0.3, Top Layer to Bottom Layer(PWR), tented both sides, 300 vias
v2: diameter 0.65, hole 0.4, Top Layer to Bottom Layer(PWR), tented both sides, 45 vias
v3: diameter 1.85, hole 0.85, Top Layer to Bottom Layer(PWR), 9 vias
v4: diameter 5, hole 3.4, Top Layer to Bottom Layer(PWR), 5 vias
v5: diameter 0.65, hole 0.4, Top Layer to Bottom Layer(PWR), 5 vias
v6: diameter 1.5, hole 0.75, Top Layer to Bottom Layer(PWR), 4 vias
v7: diameter 3.1, hole 2.1, Top Layer to Bottom Layer(PWR), 2 vias
v8: diameter 0.4/0.4/0.4/0.4 (per signal layer), hole 0.3, Top Layer to Bottom Layer(PWR), tented both sides, 1 vias

## Nets (pads, with @x,y where several pads share a name; then routed paths per layer and width w, separated by ;. In a path a pad name is that pad's centre, name@x,y a point inside that pad or via, vN(x,y) a via of type N, cw(c..) or ccw(c..) an arc to the next point about the centre after c; other vN are vias at no path point)
3V3: C1.1 C2.1 C3.2 C4.2 C35.2 IC1.2 IC5.24 IC5.33 L1.1 R1.2 R2.1 R7.1 R9.1 R11.1 R14.1 R15.2 R25.2 | length 108.5
  Top Layer w0.25: IC5.33 47.775,43.425 47.1,44.1 47.1,45.9 50.097,48.897 50.647,48.897 R25.2 51.375,48.875 52.025,48.875 52.3,48.6 52.3,48.4 52.302,48.398 52.302,47.878 C35.2 ; v1(52.3,46) 52.3,47 C35.2@52.4,47.1 ; IC5.24 v1@52.325,46
  Top Layer w0.6: v3(1.85,45.23) 2.089,44.991 2.984,44.991 4.975,43 5.6,43 5.85,42.75 L1.1 ; C4.2 C3.2 ; C2.1 8.175,42.625 8.175,43.825 9.45,45.1 9.45,49.525 9.425,49.55 9.425,57.175 C3.2 ; C1.1@8.032,40.707 C1.1 8.095,40.645 8.095,38.055 R1.2 ; v5(12.1,57.27) 12.065,57.235 9.435,57.235 C3.2 ; R2.1 v5(43.1,58.3) ; v6(47.548,58.47) 47.548,54.152 51,50.7 R25.2
  Bottom Layer(PWR) w0.6: v2(8.2,38) 15.615,38 v3(24.09,29.525) ; v5(12.1,57.27) 13.161,58.331 v5(35.222,58.331) ; v5(43.1,58.3) 43.11,58.31 47.41,58.31 v6@47.5,58.4
ALERT: IC1.20 IC6.19 R14.2 | length 108.1
  Top Layer w0.3: IC6.19 v1(87.8,13.825)
  Int1 (Signal) w0.3: v1(7.55,53.4) 9.1,51.85 9.1,43 13.4,38.7 18.1,38.7 v1(20.2,40.8) 22.6,43.2 40.133,43.2 45.741,37.593 45.741,37.326 69.917,13.15 72.85,13.15 74.2,11.8 85.775,11.8 v1(87.8,13.825)
CAL: IC1.10 IC5.31 | length 37.6
  Top Layer w0.25: v1@47.7,44.425 IC5.31
  Int1 (Signal) w0.25: v1(12.1,47.11) 13.31,45.9 40.995,45.9 42.495,44.4 v1(47.7,44.4)
CC1: IC6.1 IC6.2 J2.A5 | length 3.7
  Top Layer w0.3: J2.A5 87.85,8.075 88.55,8.775 IC6.1 IC6.2
CC2: IC6.4 IC6.5 J2.B5 | length 3.5
  Top Layer w0.3: IC6.4 IC6.5 90.55,8.4 90.85,8.1 J2.B5
CHARGE: IC1.24 IC2.6 | length 47.1
  Top Layer w0.25: IC2.6 v1(53.35,15.075)
  Int1 (Signal) w0.25: v1(25.295,40.78) 26.14,41.625 38.65,41.625 48.325,31.95 48.325,20.1 v1(53.35,15.075)
DN: IC1.13 J2.A7 J2.B7 | length 99.4
  Top Layer w0.3: J2.B7 88.35,6.05 88.606,5.794 88.831,5.794 v1(88.85,5.775) 88.869,5.794 89.094,5.794 89.35,6.05 J2.A7
  Int2 (GND) w0.3: v1(12.09,43.293) 12.983,42.4 39.802,42.4 43.25,38.952 43.25,38.524 54.545,27.228 55.372,27.228 67.8,14.8 67.8,14.111 73.361,8.55 89.994,8.55 90.17,8.374 90.17,7.095 v1(88.85,5.775)
DP: IC1.14 J2.A6 J2.B6 | length 94.5
  Top Layer w0.3: J2.A6 88.85,7.8 89.087,8.037 89.35,8.037 v1(89.369,8.056) 89.594,8.056 89.85,7.8 J2.B6
  Int1 (Signal) w0.3: v1(12.09,42.023) v1@12.109,42.004
  Int2 (GND) w0.3: 12.3,42 38.364,42 41.864,38.5 42.708,38.5 54.379,26.828 55.172,26.828 67.4,14.6 67.4,13.945 73.289,8.056 v1(89.369,8.056)
EN: C10.1 IC1.3 R7.2 S2.2 S2.4 | length 44.8
  Top Layer w0.3: C10.1 45.05,46.65 S2.2 S2.4 ; S2.4@45,56.425 R7.2
  Int1 (Signal) w0.3: v1(12.1,56) 44.573,56 44.998,56.425 v1(45.025,56.425)
ENABLE: IC1.9 IC5.30 | length 39.1
  Top Layer w0.25: IC5.30 v1@49.325,46
  Int1 (Signal) w0.25: v1(12.1,48.38) 14.18,46.3 49,46.3 v1(49.3,46)
GHA: IC5.6 Q5.1 | length 51.6
  Top Layer w0.25: v2(51.8,36.9) 51.825,36.925 IC5.6
  Int2 (GND) w1.9: v2(51.8,36.9) 51.725,36.975 49.225,36.975 46.4,39.8 46.4,47.5 52.4,53.5 73,53.5 76.475,50.025 v2(76.475,49.02)
GHB: IC5.15 Q6.1 | length 10.9
  Top Layer w0.25: IC5.15 55.875,41.925
  Top Layer w0.6: 55.875,41.925 56.09,41.71 56.91,41.71 57.5,42.3 57.5,43.6 58.9,45 58.9,48.99 Q6.1
GHC: IC5.16 Q7.1 | length 39.3
  Top Layer w0.25: IC5.16 55.633,42.425 55.851,42.644 56.058,42.644 56.089,42.613 56.6,42.613 v2(56.676,42.537)
  Int1 (Signal) w1.8: v2(56.676,42.537) 56.676,31.324 67.565,20.435 v2(77.96,20.435)
GLA: IC5.8 Q8.1 | length 79
  Top Layer w0.25: IC5.8 52.825,35.783 53.2,35.408 v2(53.2,35.3)
  Int2 (GND) w1.8: v2(53.2,35.3) 52.85,34.95 50.804,34.95 50.729,35.025 48.375,35.025 44.4,39 44.4,48.3 52.1,56 57.5,56 59.5,58 63.5,58 65.5,56 84.685,56 v2(91.675,49.01)
GLB: IC5.13 Q9.1 | length 10.1
  Top Layer w0.25: IC5.13 56.675,40.925
  Top Layer w0.6: 56.675,40.925 57.4,40.2 57.4,36.5 58.835,35.065 58.835,34.275 Q9.1
GLC: IC5.18 Q10.1 | length 55.3
  Top Layer w0.25: IC5.18 56.125,43.425 56.7,44 v2(56.7,45.2)
  Int1 (Signal) w1.8: v2(56.7,45.2) 57.7,45.2 58.8,44.1 58.8,32.7 66,25.5 73.5,25.5 76,23 86.46,23 v2(90.75,18.71)
GND: C1.2 C2.2 C3.1 C4.1 C6.1 C7.1 C8.1 C9.1 C10.2 C12.1 C13.1 C15.1 C16.1 C18.2 C20.2 C21.2 C22.1 C23.2 C24.2 C25.2 C26.2 C27.2 C28.2 C29.1 C30.1 C33.1 C34.1 C35.1 C36.1 D2.2 D3.2 IC1.1 IC1.40 IC1.41 IC1.42 IC1.43 IC1.44 IC1.45 IC1.46 IC1.47 IC1.48 IC1.49 IC2.8 IC2.16 IC4.3 IC4.4 IC4.5 IC4.12 IC5.10 IC5.11 IC5.20 IC5.32 IC5.40 IC5.41 IC6.10 IC6.12 IC6.13 IC6.22 IC6.25 J2.A1_B12 J2.B1_A12 J2.SH1 J2.SH2 J2.SH3 J2.SH4 PS1.1 Q2.3 R4.1 R5.1 R16.1 R24.1 R26.1 R27.1 R28.1 R29.1 R38.1 S1.2 S1.4 S2.1 S2.3 | length 113.1
  Top Layer w0.25: v1(53.8,38.259) 53.825,38.284 IC5.10 ; IC2.16 v1(54.9,11.4) ; R28.1 54.525,32.9 IC5.11 ; IC5.20 55.375,44.425 v1(55.4,44.4)
  Top Layer w0.3: IC6.22 89.55,11.575 IC6.25 ; IC6.25@90.05,12.075 IC6.10 ; IC6.13 91.05,13.075 IC6.12
  Top Layer w0.4: 25,35.1 IC4.4 IC4.5@25,35.9
  Int1 (Signal) w0.25: v1(53.8,38.259) 53.725,38.184 53.725,38.124 53.121,37.52 51.984,37.52 51.525,37.979 51.525,43.101 62.874,54.45 87.6,54.45 v1(89.8,56.65)
  Int2 (GND) w0.25: v1(55.4,44.4) 55.429,44.371 55.62,44.371 60.737,39.254 60.737,33.265 68.502,25.5 79.3,25.5 79.8,25 87.4,25 v1(88.825,26.425)
  other v1: 40,2 44,2 46,2 48,2 60,2 62,2 64,2 66,2 70,2 78,2 86,2 88,2 90,2 92,2 39,4 45,4 55,4 59,4 61,4 65,4 69,4 71,4 79,4 85,4 93,4 40,6 44,6 54,6 56,6 62,6 80,6 39,8 41,8 43,8 45,8 61,8 97,8 99,8 44,10 62,10 94,10 96,10 98,10 41,12 43,12 61,12 95,12 97,12 99,12 66,14 70,14 78,14 80,14 82,14 96,14 98,14 39,16 55,16 40,18 42,18 54,18 56,18 78,18 80,18 88,18 39,20 65,20 40,22 90,22 92,22 41,24 67,24 76,26 86,26 92,26 2,30 6,30 8,30 10,30 12,30 14,30 16,30 18,30 20,30 28,30 54,30 7,32 13,32 15,32 19,32 29,32 53,32 65,32 9.7,33.35 2,34 8,34 34,34 36,34 62,34 22.7,35 13,36 15,36 37,36 55,36 61,36 63,36 65,36 2,38 22,38 28,38 30,38 13,40 29,40 31,40 65,40 4,42 5,44 15,44 19,44 61,44 65,44 60,46 62,46 61,48 65,48 67,48 69,48 71,48 73,48 75,48 81,48 89,48 93,48 95,48 97,48 99,48 4,50 6,50 22,50 24,50 26,50 28,50 54,50 56,50 58,50 66,50 74,50 78,50 94,50 96,50 98,50 15,52 17,52 23,52 25,52 27,52 31,52 35,52 37,52 39,52 41,52 43,52 53,52 55,52 57,52 65,52 77,52 91,52 93,52 95,52 97,52 99,52 14,54 16,54 18,54 20,54 22,54 24,54 26,54 28,54 32,54 34,54 36,54 38,54 40,54 42,54 44,54 46,54 94,54 98,54 49,56 87,56 93,56 99,56 2,58 6,58 54,58 66,58 68,58 70,58 72,58 74,58 76,58 78,58 80,58 82,58 84,58 86,58 88,58 90,58 92,58 94,58 98,58
  other v3: 21.55,29.525 1.85,47.77
  other v4: 42,4 96.75,4.5 4,32 4,56 96,56
  other v6: 55.168,58.47
INHA: IC1.11 IC5.34 | length 37.8
  Top Layer w0.25: v1(47.65,42.9) 47.675,42.925 IC5.34
  Int1 (Signal) w0.25: v1(12.1,45.84) 12.44,45.5 40.9,45.5 43.5,42.9 v1(47.65,42.9)
INHB: IC1.15 IC5.36 | length 37.6
  Top Layer w0.25: v1(47.65,41.9) 47.675,41.925 IC5.36
  Int1 (Signal) w0.25: v1(13.865,40.78) 17.869,44.784 40.616,44.784 43.5,41.9 v1(47.65,41.9)
INHC: IC1.18 IC5.38 | length 33.5
  Top Layer w0.25: v1(47.65,40.903) 47.672,40.925 IC5.38
  Int1 (Signal) w0.25: v1(17.675,40.78) 20.851,43.956 40.444,43.956 43.5,40.9 47.647,40.9 v1(47.65,40.903)
INLA: IC1.12 IC5.35 | length 37.9
  Top Layer w0.25: v1(47.7,42.4) 47.725,42.425 IC5.35
  Int1 (Signal) w0.25: v1(12.1,44.57) 12.664,45.134 40.761,45.134 43.495,42.4 v1(47.7,42.4)
INLB: IC1.17 IC5.37 | length 34.9
  Top Layer w0.25: v1@47.7,41.425 IC5.37
  Int1 (Signal) w0.25: v1(16.449,40.8) 20.017,44.368 40.532,44.368 43.475,41.425 47.675,41.425 v1(47.7,41.4)
INLC: IC1.19 IC5.39 | length 32.2
  Top Layer w0.25: v1@47.7,40.425 IC5.39
  Int1 (Signal) w0.25: v1(18.945,40.78) 21.765,43.6 40.3,43.6 43.5,40.4 v1(47.7,40.4)
IO0: C6.2 IC1.27 R2.2 S1.1 S1.3 | length 18.8
  Top Layer w0.3: IC1.27 29.63,42 31.2,42 33.19,43.99 C6.2 33.25,46.66 S1.1 S1.3 33.3,56.425 R2.2
MISO_DRV: IC1.5 IC5.26 | length 65.1
  Top Layer w0.25: IC5.26 v1@51.325,46
  Int1 (Signal) w0.25: v1(15.15,50.3) 17.45,48 29.379,48 29.424,47.955 29.776,47.955 29.821,48 49.401,48 51.271,46.13 51.271,46.029 v1(51.3,46)
  Int2 (GND) w0.25: v3(1.85,50.31) 3.865,52.325 9.979,52.325 10.729,51.575 13.875,51.575 v1(15.15,50.3) ; v3(1.85,52.85) 2.025,53.025 5.7,53.025 7.075,54.4 11.2,54.4 v1(12.1,53.5)
MOSI_DRV: IC1.6 IC5.27 | length 42.2
  Top Layer w0.25: IC5.27 v1@50.825,46
  Int1 (Signal) w0.25: v1(12.1,52.19) 16.79,47.5 49.401,47.5 50.725,46.176 50.725,46.116 50.8,46.041 v1(50.8,46)
NetC5_1: C5.1 PS1.6 | length 5.8
  Top Layer w0.9: C5.1 4.577,37.673 5.877,37.673 7.7,35.85 PS1.6@9.55,35.85
NetC5_2: C5.2 L1.2 PS1.2 | length 15.7
  Top Layer w0.6: C5.2@2.89,37.74 3.14,37.49 3.14,36.66 3.675,36.125 4.625,36.125 8.75,32 10.25,32 10.65,32.4 PS1.2
  Top Layer w0.9: L1.2 2.93,41.52 C5.2
NetC7_2: C7.2 IC2.14 | length 5.4
  Top Layer w0.25: v1(53.35,10.725) IC2.14
  Bottom Layer(PWR) w0.25: v1(53.35,10.725) 55.075,9 v1(57.39,9)
NetC9_2: C9.2 IC2.3 R3.2 | length 18.6
  Top Layer w0.25: IC2.3 IC2.3@55.05,13.35
  Top Layer w0.3: IC2.3@55.05,13.35 56.283,14.583 56.283,16.782 56.458,16.958 57.342,16.958 C9.2 57.808,16.958 59.633,16.958 60.2,16.39 60.2,8.275 59.25,7.325 R3.2
NetC11_1: C11.1 IC2.1 | length 4.8
  Top Layer w0.3: IC2.1@55.15,12.35 55.435,12.065 58.335,12.065 58.64,11.76 58.64,11.16 C11.1
NetC11_2: C11.2 IC2.15 L2.2 | length 1.1
  Top Layer w0.25: L2.2@51.6,7.575 L2.2@51.6,8.675
NetC12_2: C12.2 C13.2 IC2.2 LED1.2 R30.2 | length 18.3
  Top Layer w0.6: v1(57.355,13.225) C13.2@57.355,14.415 ; v2(60.886,14.086) 61.863,15.062 61.912,15.062
  Bottom Layer(PWR) w0.3: v1(57.355,13.225) 58.15,12.43 58.15,2.477 57.7,2.027 v8(57.7,2)
  Bottom Layer(PWR) w0.6: v2(57.365,15.025) 59.948,15.025 v2(60.886,14.086)
NetC14_2: C14.2 IC3.8 IC3.9 R10.1 | length 6.7
  Top Layer w0.25: 46.375,18.475 46.575,18.275 IC3.8
  Top Layer w0.65: IC3.9 46.375,18.475 46.375,19.275 45.55,20.1 R10.1 45.562,21.688 46.977,21.688 C14.2
NetC17_2: C17.2 IC3.7 R13.1 | length 8.2
  Top Layer w0.25: IC3.7 47.633,17.875 47.846,18.088 v1(47.887,18.088)
  Top Layer w0.6: R13.1 C17.2
  Bottom Layer(PWR) w0.6: v2(47,23.7) 47,18.975 v1(47.887,18.088)
NetC19_1: C19.1 D3.1 Q4.2 R20.2 R33.2 | length 11.5
  Top Layer w0.6: Q4.2 67.93,12.892 C19.1 ; D3.1@66.075,17.5 R20.2 67.94,17.49 67.94,15.51 C19.1 ; R33.2 67.72,15.225 67.93,15.435 C19.1
NetC19_2: C19.2 R21.1 | length 1.4
  Top Layer w0.6: C19.2 R21.1
NetC20_1: C20.1 C21.1 IC4.6 IC4.7 R32.1 | length 8.4
  Top Layer w0.2: IC4.7 24.2,36.5 IC4.6
  Top Layer w0.9: 24.2,37.455 24.2,37.923 24.727,38.45 26.313,38.45 26.84,37.923 26.84,37.145 26.9,37.085 C21.1 ; C21.1@27.21,37.085 C20.1 30.09,37.085 30.1,37.075
NetC22_2: C22.2 IC6.24 Q3.3 Q4.3 R19.2 | length 32.2
  Top Layer w0.6: R19.2 67.499,1.05 67.85,1.401 Q4.3 ; Q4.3@67.85,4.745 68.08,4.975 68.525,4.975 72.064,8.514 v2(72.064,10.66)
  Bottom Layer(PWR) w0.6: v2(72.064,10.66) 72.078,10.66 72.638,10.1 v5(85.8,10.1)
NetC23_1: C23.1 C24.1 IC4.1 IC4.8 R34.2 | length 6.4
  Top Layer w0.4: C24.1@23.175,33.12 23.485,33.43 23.485,33.646 23.503,33.664 23.503,34.747 23.5,34.75 IC4.1@23.5,35.072 ; IC4.1 IC4.8
  Top Layer w0.9: 19.975,33.1 21.155,33.1 C23.1 C24.1
NetC25_1: C25.1 D1.1 R18.1 R22.2
NetC26_1: C26.1 IC6.23
NetC27_1: C27.1 C28.1 IC4.2 R35.2 | length 4.1
  Top Layer w0.4: IC4.2 24.2,33.67 24.215,33.655 24.215,33.43 24.525,33.12 24.725,33.12 C27.1
  Top Layer w0.9: C27.1 26.5,33.12 C28.1@26.505,33.125
NetC29_2: C29.2 IC6.21
NetC30_2: C30.2 IC4.11 | length 2.1
  Top Layer w0.2: C30.2 21,34.89 21.41,35.3 21.8,35.3 22,35.5 IC4.11
NetC31_1: C31.1 IC5.2 | length 4
  Top Layer w0.25: C31.1 48.78,37.48 49.825,38.525 IC5.2
NetC31_2: C31.2 IC5.1 | length 2.2
  Top Layer w0.5: C31.2 47.062,39.162 IC5.1@49.2,39.162
NetC32_2: C32.2 IC5.3 | length 6.8
  Top Layer w0.25: C32.2 47.585,34.085 47.585,35.247 50.325,37.987 IC5.3
NetC36_2: C36.2 IC1.25 R37.1 R38.2 | length 51.8
  Top Layer w0.65: v1(39.5,12.375) R38.2 39.502,10.848 41.397,10.848 C36.2
  Int1 (Signal) w0.3: v1(26.565,40.78) 27.035,41.25 38.45,41.25 47.9,31.8 47.9,20.775 v1(39.5,12.375)
NetC37_1: C37.1 C38.2 IC7.2 R41.1 | length 3.8
  Top Layer w0.3: IC7.2 40.725,38.1 41.035,37.79 41.035,37.235 C37.1
NetC37_2: C37.2 IC7.1 R39.1 | length 3.6
  Top Layer w0.3: IC7.1 39.415,37.45 39.775,37.09 C37.2
  Top Layer w1: C37.2 39.785,36.865 39.785,35.225 R39.1
NetC39_2: C39.2 IC7.4 | length 1.6
  Top Layer w0.6: IC7.4@38.483,39.525 38.483,41.068 C39.2
NetC40_2: C40.2 IC7.7 R40.2
NetIC2_10: IC2.10 L2.1 R6.1
NetIC2_11: IC2.11 R8.1 | length 13.4
  Top Layer w0.25: IC2.11@51.725,12.35 IC2.11
  Top Layer w0.3: 51.6,2 50.575,2 49.275,3.3 49.275,9.175 51.7,11.6 51.7,12.174 IC2.11@51.7,12.325
NetIC2_13: IC2.13 R3.1 R4.2 | length 8.7
  Top Layer w0.25: v1(52.85,10.725) IC2.13 ; R4.2 v1(57.35,7.1)
  Bottom Layer(PWR) w0.25: v1(52.85,10.725) 52.85,10.684 52.925,10.609 52.925,10.549 56.374,7.1 v1(57.35,7.1)
NetIC3_1: IC3.1 R12.1
NetIC3_2: IC3.2 R16.2
NetIC3_3: IC3.3 Q2.1 | length 30.8
  Top Layer w0.25: v1(44.825,16.925) 44.854,16.954 44.854,17.047 45.282,17.475 IC3.3
  Top Layer w0.6: v2(57.486,27.986) 58.966,27.986 59.011,28.032 62.597,28.032 63.765,29.2 Q2.1
  Bottom Layer(PWR) w0.6: v1(44.825,16.925) 44.825,15.675 45.75,14.75 48.95,14.75 56.05,21.85 56.05,26.55 v2(57.486,27.986)
NetIC3_4: IC3.4 Q1.1 | length 20.5
  Top Layer w0.45: v1(45.55,16.6) 45.55,16.95
  Bottom Layer(PWR) w0.45: v1(45.55,16.6) 46.525,15.625 48.5,15.625 55.19,22.315 v2(55.19,29.7)
NetIC3_5: IC3.5 Q1.3 R17.1 | length 15.5
  Top Layer w0.45: v1(47.2,16.575) 47.2,16.95
  Bottom Layer(PWR) w0.45: v1(47.2,16.575) 48.225,16.575 50.61,18.96 v2(50.61,29.7)
NetIC4_10: IC4.10 R24.2 | length 2.2
  Top Layer w0.2: R24.2 20.9,36.4 21.3,36 IC4.10
NetIC6_9: IC6.9 R20.1 | length 26.6
  Top Layer w0.6: R20.1 77.45,17.5 78.725,16.225 90.775,16.225 93.575,13.425 93.575,12.252
NetIC6_16: IC6.16 R22.1 | length 17.7
  Top Layer w0.3: v2(89.5,14.75) 89.55,14.7 IC6.16
  Bottom Layer(PWR) w0.6: v5(82.275,0.95) 82.275,2.197 89.5,9.422 v2(89.5,14.75)
NetIC6_18: IC6.18 R23.1
NetIC7_3: IC7.3 R42.1 | length 1.7
  Top Layer w0.3: IC7.3 39.525,38.75 39.875,39.1 R42.1
NetLED1_1: LED1.1 R8.2 | length 2.2
  Top Layer w0.25: 53.5,2 LED1.1
NetPS1_4: PS1.4 R1.1 R5.2 | length 3.7
  Top Layer w0.6: R1.1 R5.2 11.6,37.95 PS1.4
NetQ1_2: Q1.2 Q2.2
NetQ3_1: Q3.1 Q4.1 R19.1 R21.2 R23.2 | length 31
  Top Layer w0.6: R19.1 60.45,3.15 63.048,3.15 63.278,3.38 Q4.1 63.224,4.029 63.224,5.824 64,6.6 68.45,6.6 70.3,8.45 70.3,12.275 71.375,13.35 ; R23.2 73.1,15.5 R21.2 72.675,15.3 72.675,14.65 71.375,13.35 ; Q3.1 76.636,12.714 76,13.35 71.375,13.35
NFAULT: IC1.32 IC5.25 R25.1 | length 26
  Top Layer w0.25: R25.1 51.125,47.35 51.5,46.975 51.5,46.6 51.771,46.329 51.771,46.029 v1(51.8,46) ; IC5.25 v1@51.825,46
  Int1 (Signal) w0.25: v1@29.436,48.38 49.521,48.38 51.771,46.13 51.771,46.029 v1(51.8,46)
  other v1: 29.6,48.38
PWM_Servo: IC1.26 | length 11.7
  Int1 (Signal) w0.3: v3(26.63,29.525) 26.63,39.581 v1(27.813,40.764)
RESET: IC1.23 IC6.6 R26.2 | length 84.5
  Top Layer w0.3: IC6.6 v1(91.05,8.875) 91.077,8.875 91.177,8.775 R26.2
  Int1 (Signal) w0.3: v1(24.1,40.7) 25.4,42 39.636,42 44.541,37.096 44.541,36.829 69.42,11.95 72.25,11.95 75.075,9.125 90.8,9.125 v1(91.05,8.875)
RXD: IC1.36 | length 25.1
  Int1 (Signal) w0.3: v1(29.6,53.46) 31.34,55.2 49.358,55.2 v6(52.628,58.47)
SCL: IC1.22 IC6.7 R9.2 | length 109
  Top Layer w0.3: v1(91.8,9.825) IC6.7
  Int1 (Signal) w0.3: v1(7.55,49.4) 7.55,43.25 13.1,37.7 19.773,37.7 22.773,40.7 v1(22.8,40.7) 24.5,42.4 39.802,42.4 44.941,37.261 44.941,36.995 69.585,12.35 72.45,12.35 73.95,10.85 90.775,10.85 v1(91.8,9.825)
SCLK: IC1.7 IC5.28 | length 49.5
  Top Layer w0.25: IC5.28 v1@50.325,46
  Int1 (Signal) w0.25: v1(12.1,50.92) 15.92,47.1 49.301,47.1 50.271,46.13 50.271,46.029 v1(50.3,46)
  Int2 (GND) w0.3: v3(4.875,48.25) 9.43,48.25 v1(12.1,50.92)
SDA: IC1.21 IC6.8 R11.2 | length 111
  Top Layer w0.3: IC6.8 v1(92.65,11.075)
  Int1 (Signal) w0.3: v1(7.55,51.4) 8.4,50.55 8.4,43.1 13.3,38.2 18.9,38.2 v1(21.5,40.8) 23.5,42.8 39.968,42.8 45.341,37.427 45.341,37.161 69.751,12.75 72.65,12.75 74.075,11.325 92.4,11.325 v1(92.65,11.075)
SHA: IC5.7 pad.6@78.55,47.254 Q5.3 Q8.2 | length 49
  Top Layer w0.25: v1@52.325,38.3 IC5.7
  Top Layer w1.2: v1(76.475,53.6) 78.375,53.6 79.85,52.125 ; pad.6@78.55,47.254 79.85,52.125 ; Q8.2 84.5,52.125 79.85,52.125
  Int1 (Signal) w0.25: v1(52.3,38.3) 52.3,42.886 56.299,46.885 63.014,53.6 v1(76.475,53.6)
SHB: IC5.14 pad.6@64.125,45.825 Q6.3 Q9.2 | length 26.2
  Top Layer w0.25: IC5.14 55.375,41.425 v1(55.4,41.4)
  Top Layer w1.2: Q9.2 63.725,42.625 63.725,45.154 64.529,45.958 pad.6@64.529,46.074 ; Q6.3 63.715,46.888 63.934,46.67 63.934,46.016 pad.6@64.125,45.825
  Int1 (Signal) w0.25: v1(55.4,41.4) 54.7,42.1 54.7,44.791 59.709,49.8 v1(63.7,49.8)
SHC: IC5.17 pad.6@81.325,26.625 Q7.3 Q10.2 | length 46.2
  Top Layer w0.25: IC5.17 55.375,42.925 v1(55.4,42.9)
  Top Layer w1.2: v1(77.96,25.015) 79.715,25.015 pad.6@81.325,26.625 ; pad.6@81.516,26.434 82.251,26.434 83.14,25.545 83.14,23.863 83.843,23.16 84.475,23.16 Q10.2@86.775,20.86
  Int2 (GND) w0.25: v1(55.4,42.9) 60.3,38 60.3,33.207 68.417,25.09 77.844,25.09 77.919,25.015 v1(77.96,25.015)
SOA: IC1.33 IC5.23 | length 25.6
  Top Layer w0.25: IC5.23 v1@52.825,46
  Int1 (Signal) w0.25: v1(29.6,49.65) 30.45,48.8 50.101,48.8 52.771,46.13 52.771,46.029 v1(52.8,46)
SOB: IC1.34 IC5.22 | length 26.7
  Top Layer w0.25: IC5.22 v1@53.325,46
  Int1 (Signal) w0.25: v1(29.6,50.92) 31.32,49.2 50.201,49.2 53.225,46.176 53.225,46.116 53.3,46.041 v1(53.3,46)
SOC: IC1.35 IC5.21 | length 27.7
  Top Layer w0.25: v1(53.8,46) 53.825,45.975 IC5.21
  Int1 (Signal) w0.25: v1(29.6,52.19) 32.19,49.6 50.301,49.6 53.771,46.13 53.771,46.029 v1(53.8,46)
SPA: IC5.9 Q8.3 R27.2 | length 52.1
  Top Layer w0.25: v1(53.3,38.3) 53.325,38.325 IC5.9
  Int1 (Signal) w0.25: v1(53.3,38.3) 52.875,37.875 52.124,37.875 51.875,38.124 51.875,42.956 62.944,54.025 91.29,54.025 v1(91.7,53.615)
SPB: IC5.12 Q9.3 R28.2 | length 18.5
  Top Layer w0.25: IC5.12 55.775,40.425 56.35,39.85 R28.2
  Top Layer w1.2: R28.2@56.4,32.65 56.925,32.65 57.725,31.85 63.012,31.85 63.715,32.553 Q9.3 Q9.3@63.715,34
SPC: IC5.19 Q10.3 R29.2 | length 49.4
  Top Layer w0.25: IC5.19 55.375,43.925 v1(55.4,43.9)
  Int2 (GND) w0.25: v1(55.4,43.9) 54.3,42.8 54.3,38.7 69,24 90.04,24 v1(90.75,23.29)
SS: IC1.8 IC5.29 | length 49
  Top Layer w0.25: IC5.29 v1@49.825,46
  Int1 (Signal) w0.25: v1(12.1,49.65) 15.05,46.7 49.201,46.7 49.725,46.176 49.725,46.116 49.8,46.041 v1(49.8,46)
  Int2 (GND) w0.25: v3(4.875,45.71) 8.16,45.71 v1(12.1,49.65)
ST: IC1.4 IC4.9 R15.1 | length 36.4
  Top Layer w0.3: 22.7,36.6 v1(22.7,37.2)
  Int1 (Signal) w0.3: v1(12.1,54.73) 11.43,55.4 v1(7.55,55.4) 6.6,54.45 6.6,43.5 12.9,37.2 v1(22.7,37.2)
TXD: IC1.37 | length 22
  Int1 (Signal) w0.3: v1(29.6,54.73) 30.47,55.6 47.24,55.6 v6@50.04,58.4
  other v6: 50.088,58.47
VBAT+: C15.2 C16.2 IC2.9 J1.1 R6.2 R10.2 R12.2 R31.1 R37.2 R39.2 R40.1 | length 39.5
  Top Layer w0.6: R37.2 39.725,14.275 40.8,15.35 40.825,15.35 ; J1.1@39.61,26.8 39.61,23.54 41.025,22.125 ; R10.2 43.65,21.925 43.45,22.125 43.225,22.125 41.025,22.125 ; C15.2 45.19,14.05 42.125,14.05 40.825,15.35 ; 40.825,15.35 40.825,18.675 R12.2 41.025,22.125
  Top Layer w1: R40.1 36.025,35.625 38.325,33.325 R39.2
  Top Layer w1.2: v7@39.1,30.7 39.1,31.214 39.85,31.964 R39.2@39.85,33.225
  Top Layer w1.7: v7@39.047,30.7 38.668,30.321 38.668,30.003 39.56,29.111 J1.1
  Bottom Layer(PWR) w2.5: R31.1 35.935,30.535 36.9,30.535 38.285,30.535 v7(38.4,30.65)
VBAT-: C14.1 C17.1 C38.1 C39.1 C40.1 IC3.6 IC7.5 IC7.6 IC7.9 J1.3 R17.2 | length 44
  Top Layer w0.25: IC3.6 48.275,17.475 48.61,17.81 C14.1
  Top Layer w0.3: IC7.6 36.65,38.75 IC7.9 36.975,38.7 36.275,39.4 IC7.5
  Top Layer w0.6: C40.1 34.06,40.78 35.305,40.78 35.525,41 ; 35.525,39.625 35.525,41 ; C39.1 39.95,41.335 39.95,42.05 39.425,42.575 37.1,42.575 35.525,41 ; J1.3 J1.3@44.929,26.2 ; J1.3@44.929,26.099 45.554,25.475 R17.2 47.35,25.275 48.185,25.275 48.61,24.85 C17.1 C14.1
  Top Layer w1: C39.1 41.949,41.125 44.345,38.729 C38.1 44.335,36.865 v7(44.335,29.335)
  Top Layer w1.8: v7(44.335,29.335) 44.584,29.086 44.584,28.064 44.63,28.018 44.63,26.223 J1.3@44.637,26.216
VBATJ: R31.2 R35.1 R36.1 | length 3.7
  Top Layer w0.9: v2(28.075,31.125) 28.075,31.9
  Bottom Layer(PWR) w0.9: v2(28.075,31.125) 30.775,31.125 30.9,31
VBATM: J1.2 R13.2 R41.2 R42.2 | length 17.2
  Top Layer w0.6: J1.2 42.165,26.135 42.165,24.885 42.9,24.15 43.45,24.15 43.65,23.95 R13.2
  Top Layer w1.2: v1(42.075,33.325) 42.075,31.675 41.3,30.9 41.3,27.244 41.775,26.769 41.775,26.701 42.1,26.376 J1.2
  Bottom Layer(PWR) w0.6: v1(41.775,39.225) 42.075,38.925 v1(42.075,33.325)
VBUS: C18.1 D1.2 D2.1 J2.A4_B9 J2.B4_A9 Q3.2 R18.2
VDRAIN: C32.1 C33.2 C34.2 IC5.4 IC5.5 Q5.2 Q6.2 Q7.2 R36.2 | length 90.9
  Top Layer w0.25: 50.825,37.025 IC5.4 IC5.5
  Top Layer w1: C32.1 v2(50.18,33.7) 50.18,35.49 50.2,35.51 50.2,36.4 50.825,37.025
  Bottom Layer(PWR) w2.3: 31.725,36.575 33.675,36.575 40.49,43.39 ; 59.5,55.5 52.6,55.5 40.49,43.39 ; 62,55.5 65.5,55.5 v2(69,52) ; 71,22.5 65.2,22.5 54,33.7 v2(50.18,33.7) 40.49,43.39
  other v2: 70,22 71,22 72,22 73,22 70,23 71,23 72,23 73,23 69,51 70,51 71,51 72,51 70,52 71,52 72,52 60,55 61,55 62,55 63,55 60,56 61,56 62,56 63,56
VMCU: C8.2 PS1.3 PS1.5 R34.1 | length 9.1
  Top Layer w0.6: PS1.5 10.65,35.1 11.6,34.15 PS1.3@11.6,33.45
  Top Layer w1: 11.9,33.215 14.79,33.215 14.91,33.095 C8.2 16.96,33.105 18.15,33.105
VSYS: R30.1 R32.2 R33.1 | length 45.5
  Top Layer w0.6: 31.724,37.274 v2(31.725,38.4) ; R30.1 63.378,15.197 64.353,15.197 v2(64.363,15.188) ; v2@64.363,15.211 64.376,15.197 65.397,15.197 R33.1
  Int2 (GND) w2.3: v2(31.725,38.4) 39.3,38.4 62.512,15.188 v2(64.363,15.188)
pads on no net: IC1.16 IC1.28 IC1.29 IC1.30 IC1.31 IC1.38 IC1.39 IC2.4 IC2.5 IC2.7 IC2.12 IC6.3 IC6.11 IC6.14 IC6.15 IC6.17 IC6.20 IC7.8 J2.A8 J2.B8

## Polygon pours and split planes (outlines as drawn)
no net on Mechanical 16 "NONET_L01_P000" (solid): 66,45.5 66,28.5 93,28.5 93,45.5
no net on Mechanical 16 "NONET_L-01_P-001" (solid): 0,0 0,25 35,25 35,0
no net on Mechanical 16 "NONET_L-01_P-001" (solid): 93,45 93,15 100,15 100,45
GND on Top Layer "GND_L01_P038" (solid, remove dead copper, pour order 38): 0,60 101,60 101,0 38,0 38,28 0,28
3V3 on Top Layer "3V3_L01_P037" (solid, pour order 37): 5.3,43.3 6.5,43.3 7.425,43.225 8.55,43.225 8.55,39.975 7.425,39.975 6.5,39.9 5.3,39.9
NetC27_1 on Top Layer "NETC27_1_L01_P036" (solid, pour order 36): 25.775,32.6 25.775,33.65 28.575,33.65 28.575,32.975 28.55,32.95 27.975,32.95 27.575,32.6 27.475,32.6
NetC20_1 on Top Layer "NETC20_1_L01_P035" (solid, pour order 35): 24,37.45 24.4,37.45 24.4,36.675 24,36.675
NetIC6_9 on Top Layer "NETIC6_9_L01_P013" (solid, pour order 13): 91.4,11.725 92.3,11.725 93.275,12.45 93.875,12.45 93.875,12.025 92.3,11.425 91.4,11.425